# Altium PCB PCB1.PcbDoc
Units mm, origin at the board's own origin, x right, y up, seen from the top; angles counter-clockwise.
Board outline 152.4 x 101.6 mm, 2 copper layers (Top Layer, Bottom Layer); 5 components, 11 nets, 38 pads, 10 vias.
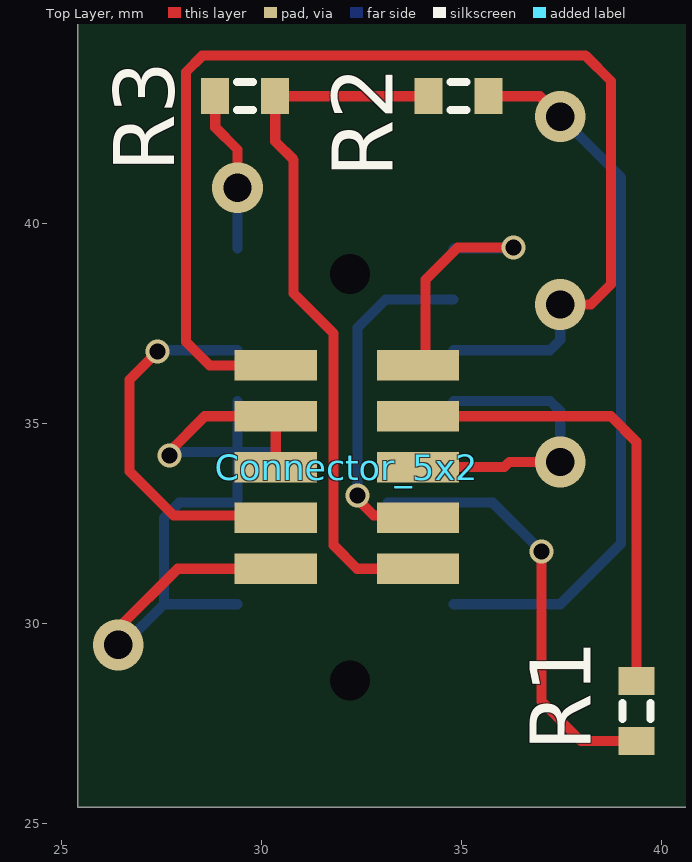
[diagram p0: Top Layer view]
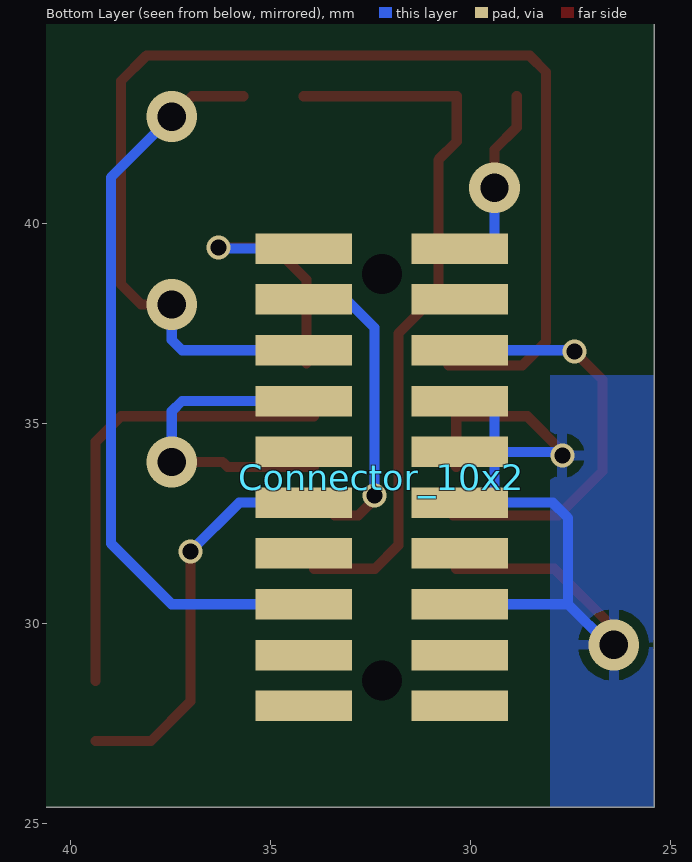
[diagram p1: Bottom Layer view, seen from below]

## Layer stack, top to bottom
Top Solder: solder mask 0.0102, Solder Resist, Dk 3.5
Top Layer: signal copper 0.0356
Dielectric 1: dielectric 0.32, FR-4, Dk 4.8
Bottom Layer: signal copper 0.0356
Bottom Solder: solder mask 0.0102, Solder Resist, Dk 3.5

## Board outline
25.4,25.4 177.8,25.4 177.8,127 25.4,127
cut-out: 130.175,97.155

## Design rules (kind name [scope] priority, off if disabled: settings)
Clearance [All] p1: gap=0.254 ignorepadtopadclearanceinfootprint=TRUE except(0: Arc-Hole Track-Hole SMDPad-Hole THPad-Hole Via-Hole Fill-Hole Poly-Hole Region-Hole Text-Hole)
PolygonConnect [All] p1: connectstyle=Relief reliefconductorwidth=0.254 reliefentries=4 polygonreliefangle="90 Angle" airgapwidth=0.254
RoutingVias [All] p1: holewidth=0.711 width=1.27 viastyle="Through Hole" minholewidth=0.711 minwidth=1.27 maxholewidth=0.711 maxwidth=1.27
SolderMaskExpansion [All] p1: expansion=0.102
Width [All] p1: maxlimit=0.254 minlimit=0.254 preferedwidth=0.254
30 further rules are at their usual default settings.

## Components (designator, comment, footprint, x,y, rotation, side; value= is the part's Value field where it differs from the comment)
Connector_5x2 "Connector_5x2" "5x2 pin" 32.131,33.909 r270 top
Connector_10x2 "XDS110 connector" "10x2 pin" 34.163,39.37 r270 bottom
R1 "RC0805JR-070RL" J1-0603 39.37,27.813 r270 top value=0
R2 "RC0805JR-070RL" J1-0603 34.925,43.18 r0 top value=0
R3 "RC0805JR-070RL" J1-0603 29.591,43.18 r180 top value=0

## Footprints (in the part's own frame and the unit in brackets; to place one, negate y for a bottom-side part, rotate by r counter-clockwise, add the part's x,y. Pads: shape width x height; smd on the part's side, far side on the other; paste and mask are expansions set on the pad)
"5x2 pin" [mil]
  rect 30x81 smd: 1(-100,-70) 2(-100,70) 3(-50,-70) 4(-50,70) 5(0,-70) 6(0,70) 7(50,-70) 8(50,70) 9(100,-70) 10(100,70)
"10x2 pin" [mil]
  rect 30x95 smd: 1(0,0) 2(0,153.54) 3(50,0) 4(50,153.54) 5(100,0) 6(100,153.54) 7(150,0) 8(150,153.54) 9(200,0) 10(200,153.54) 11(250,0) 12(250,153.54) 13(300,0) 14(300,153.54) 15(350,0) 16(350,153.54) 17(400,0) 18(400,153.54) 19(450,0) 20(450,153.54)
  round 0 hole 39.37: ""(25,76.77) ""(425,76.77)
J1-0603 [mm] "Chip Resistor, Body 1.6x0.8mm, IPC High Density"
  rect 0.7x0.9 smd: 1(-0.75,0) 2(0.75,0)
  silkscreen extent -0.2,-0.35 0.2,0.35, body extent -0.85,-0.48 0.85,0.48, height 0.9

## Part data
R1 R2 R3: library part Res3, "Resistor", LatestRevisionDate=29-May-2009, LatestRevisionNote="IPC-7351 Footprint Added.", PackageDescription="Chip Resistor", PackageReference=J1-0603, Published=8-Jun-2000, Publisher="Altium Limited"

## Via types
v1: diameter 0.6, hole 0.4, Top Layer to Bottom Layer, 5 vias
v2: diameter 1.27, hole 0.711, Top Layer to Bottom Layer, 5 vias

## Nets (pads, with @x,y where several pads share a name; then routed paths per layer and width w, separated by ;. In a path a pad name is that pad's centre, name@x,y a point inside that pad or via, vN(x,y) a via of type N, cw(c..) or ccw(c..) an arc to the next point about the centre after c; other vN are vias at no path point)
GND: Connector_5x2.3 Connector_5x2.5 Connector_5x2.9 Connector_10x2.8 Connector_10x2.10 Connector_10x2.12 Connector_10x2.16 | length 22.1
  Top Layer w0.254: v2(26.416,29.464) 26.416,29.885 27.9,31.369 Connector_5x2.9 ; v1(27.7,34.2) 27.7,34.3 28.579,35.179 Connector_5x2.3 Connector_5x2.5
  Bottom Layer w0.254: v2(26.416,29.464) 26.543,29.464 27.559,30.48 ; v1(27.7,34.2) 27.79,34.29 Connector_10x2.10@29.398,34.29 ; Connector_10x2.16@29.398,30.48 27.559,30.48 ; Connector_10x2.8@29.398,35.56 Connector_10x2.10@29.398,34.29 ; Connector_10x2.10 Connector_10x2.10@29.398,34.29 ; 27.559,30.48 27.559,32.639 27.94,33.02 29.398,33.02 Connector_10x2.10@29.398,34.29
Key: Connector_5x2.7 Connector_10x2.6 | length 9.5
  Top Layer w0.254: v1(27.4,36.8) 26.7,36.1 26.7,33.8 27.8,32.7 Connector_5x2.7@30.439,32.7
  Bottom Layer w0.254: v1@27.432,36.83 Connector_10x2.6@29.398,36.83
NetConnector_10x2_2: Connector_10x2.2 R3.2 | length 4
  Top Layer w0.254: R3.2 28.841,42.406 29.398,41.849 v2(29.398,40.894)
  Bottom Layer w0.254: Connector_10x2.2@29.398,39.37 v2(29.398,40.894)
NetConnector_10x2_11: Connector_10x2.11 R1.2 | length 10.9
  Top Layer w0.254: v1(37,31.8) 37,28.048 37.985,27.063 R1.2
  Bottom Layer w0.254: Connector_10x2.11@33.147,33.02 Connector_10x2.11 35.78,33.02 v1(37,31.8)
NetConnector_10x2_15: Connector_10x2.15 R2.2 | length 18.1
  Top Layer w0.254: R2.2 36.957,43.18 v2(37.465,42.672)
  Bottom Layer w0.254: Connector_10x2.15@34.798,30.48 37.465,30.48 38.989,32.004 38.989,41.148 v2(37.465,42.672)
nRESET: Connector_5x2.10 R2.1 R3.1 | length 18
  Top Layer w0.254: Connector_5x2.10 32.385,31.369 31.8,31.954 31.8,37.248 30.8,38.248 30.8,41.59 30.341,42.049 R3.1 R2.1
TCK: Connector_5x2.4 R1.1 | length 11.7
  Top Layer w0.254: Connector_5x2.4 38.735,35.179 39.37,34.544 R1.1
TDI: Connector_5x2.8 Connector_10x2.3 | length 8.2
  Top Layer w0.254: v1(32.4,33.2) 32.4,33.1 32.8,32.7 Connector_5x2.8@33.4,32.7
  Bottom Layer w0.254: v1(32.4,33.2) 32.4,37.4 33.1,38.1 Connector_10x2.3 Connector_10x2.3@34.798,38.1
TDO: Connector_5x2.6 Connector_10x2.7 | length 7.7
  Top Layer w0.254: Connector_5x2.6 36.068,33.909 36.195,34.036 v2(37.465,34.036)
  Bottom Layer w0.254: Connector_10x2.7@34.798,35.56 37.211,35.56 37.465,35.306 v2(37.465,34.036)
TMS: Connector_5x2.2 Connector_10x2.1 | length 6.2
  Top Layer w0.254: Connector_5x2.2@34.1,36.5 34.1,38.6 34.9,39.4 v1(36.3,39.4)
  Bottom Layer w0.254: Connector_10x2.1@34.798,39.37 v1@36.322,39.37
VTref: Connector_5x2.1 Connector_10x2.5 | length 30.7
  Top Layer w0.254: Connector_5x2.1@30.551,36.449 28.702,36.449 28.11,37.041 28.11,43.788 28.518,44.196 38.1,44.196 38.735,43.561 38.735,38.481 38.227,37.973 v2(37.465,37.973)
  Bottom Layer w0.254: Connector_10x2.5@34.798,36.83 37.211,36.83 37.465,37.084 v2(37.465,37.973)
pads on no net: Connector_10x2. Connector_10x2.4 Connector_10x2.9 Connector_10x2.13 Connector_10x2.14 Connector_10x2.17 Connector_10x2.18 Connector_10x2.19 Connector_10x2.20

## Polygon pours and split planes (outlines as drawn)
GND on Bottom Layer "GND" (solid, remove dead copper, pour order 2): 25.4,25.4 28,25.4 28,36.2 25.4,36.2

## Silkscreen, mask and mechanical layers (free items; w line width, h text height)
Mechanical 1:
  lines w0.1: 25.4,25.4 40,25.4 40,44.6 25.4,44.6 25.4,25.4